# Altium PCB Shift_register_pcb.PcbDoc
Units mm, origin at the board's own origin, x right, y up, seen from the top; angles counter-clockwise.
Board outline 40.64 x 30.48 mm, 4 copper layers (Top Layer, Inner 1, Inner 2, Bottom Layer), stack 1.301 mm thick; 19 components, 42 nets, 108 pads, 45 vias.
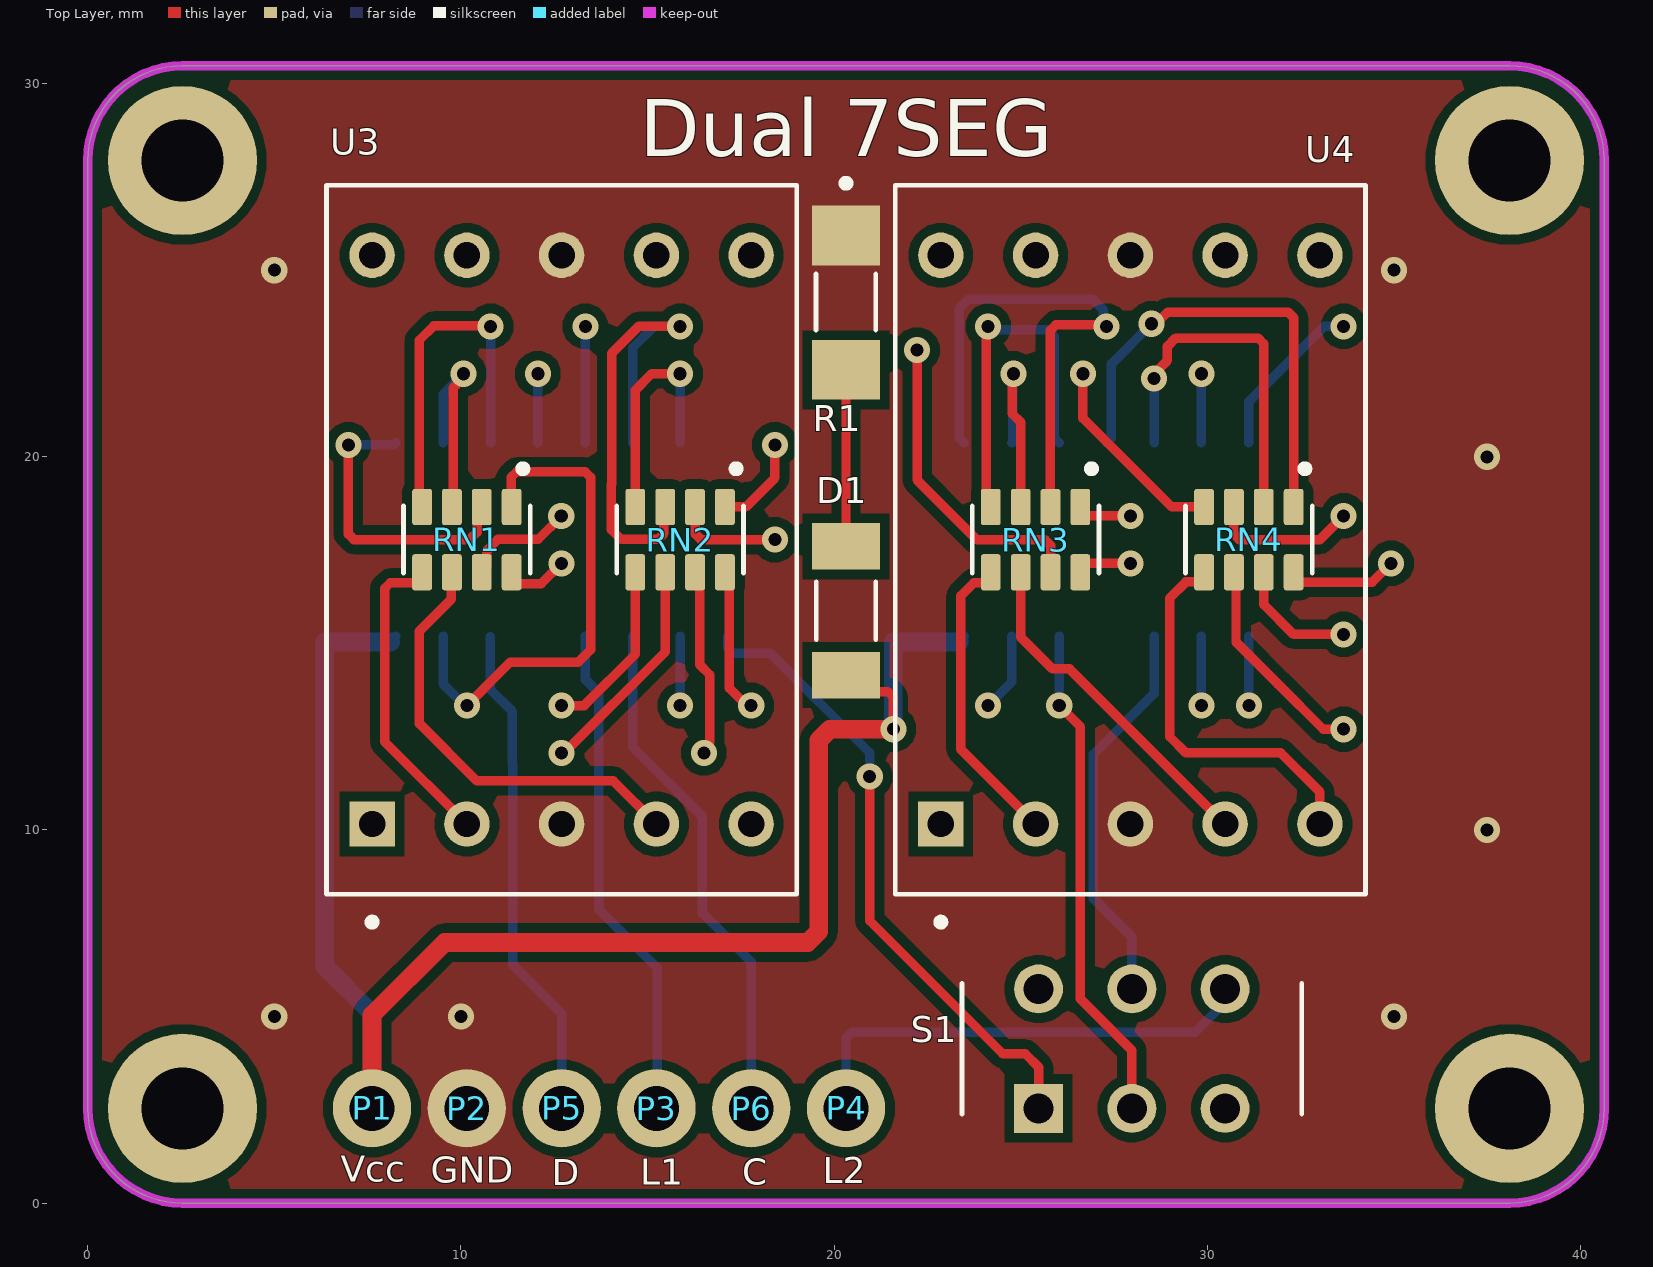
[diagram p0: Top Layer view]
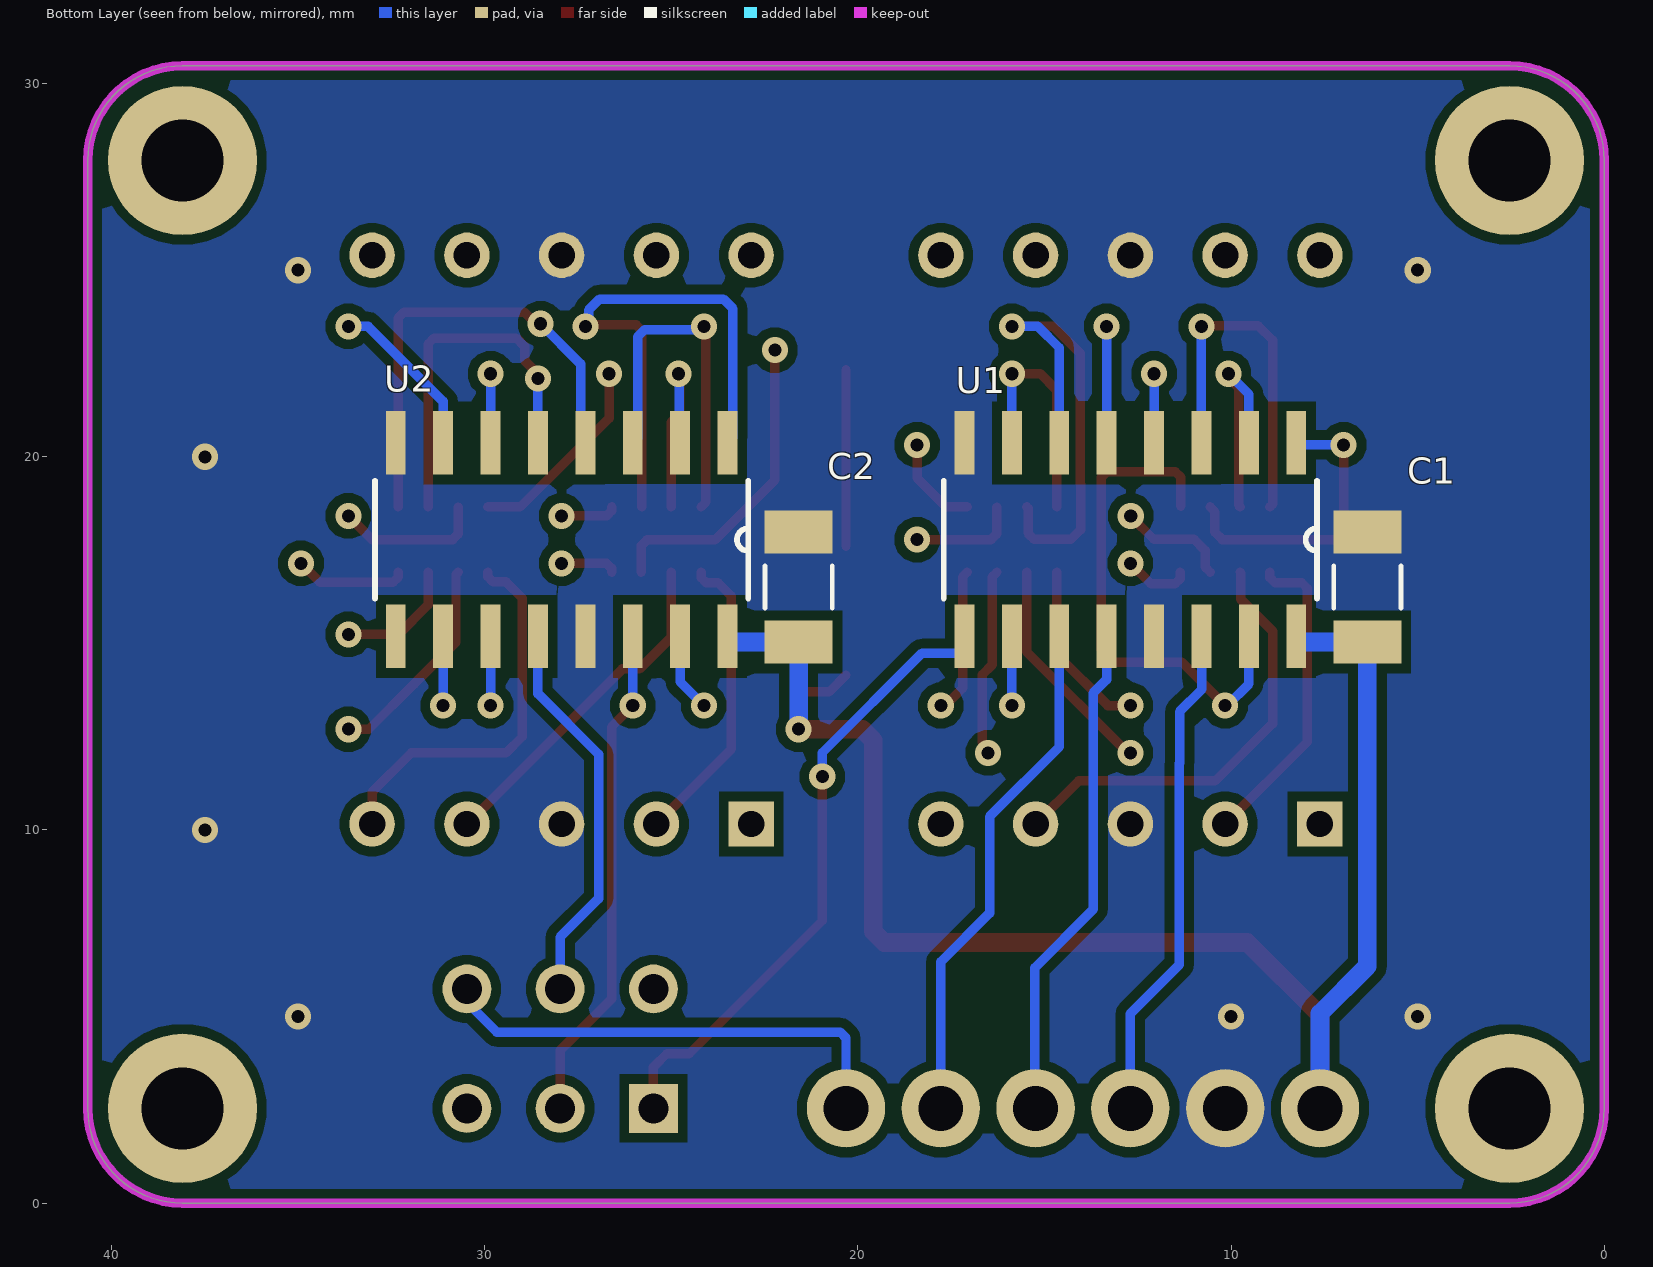
[diagram p1: Bottom Layer view, seen from below]
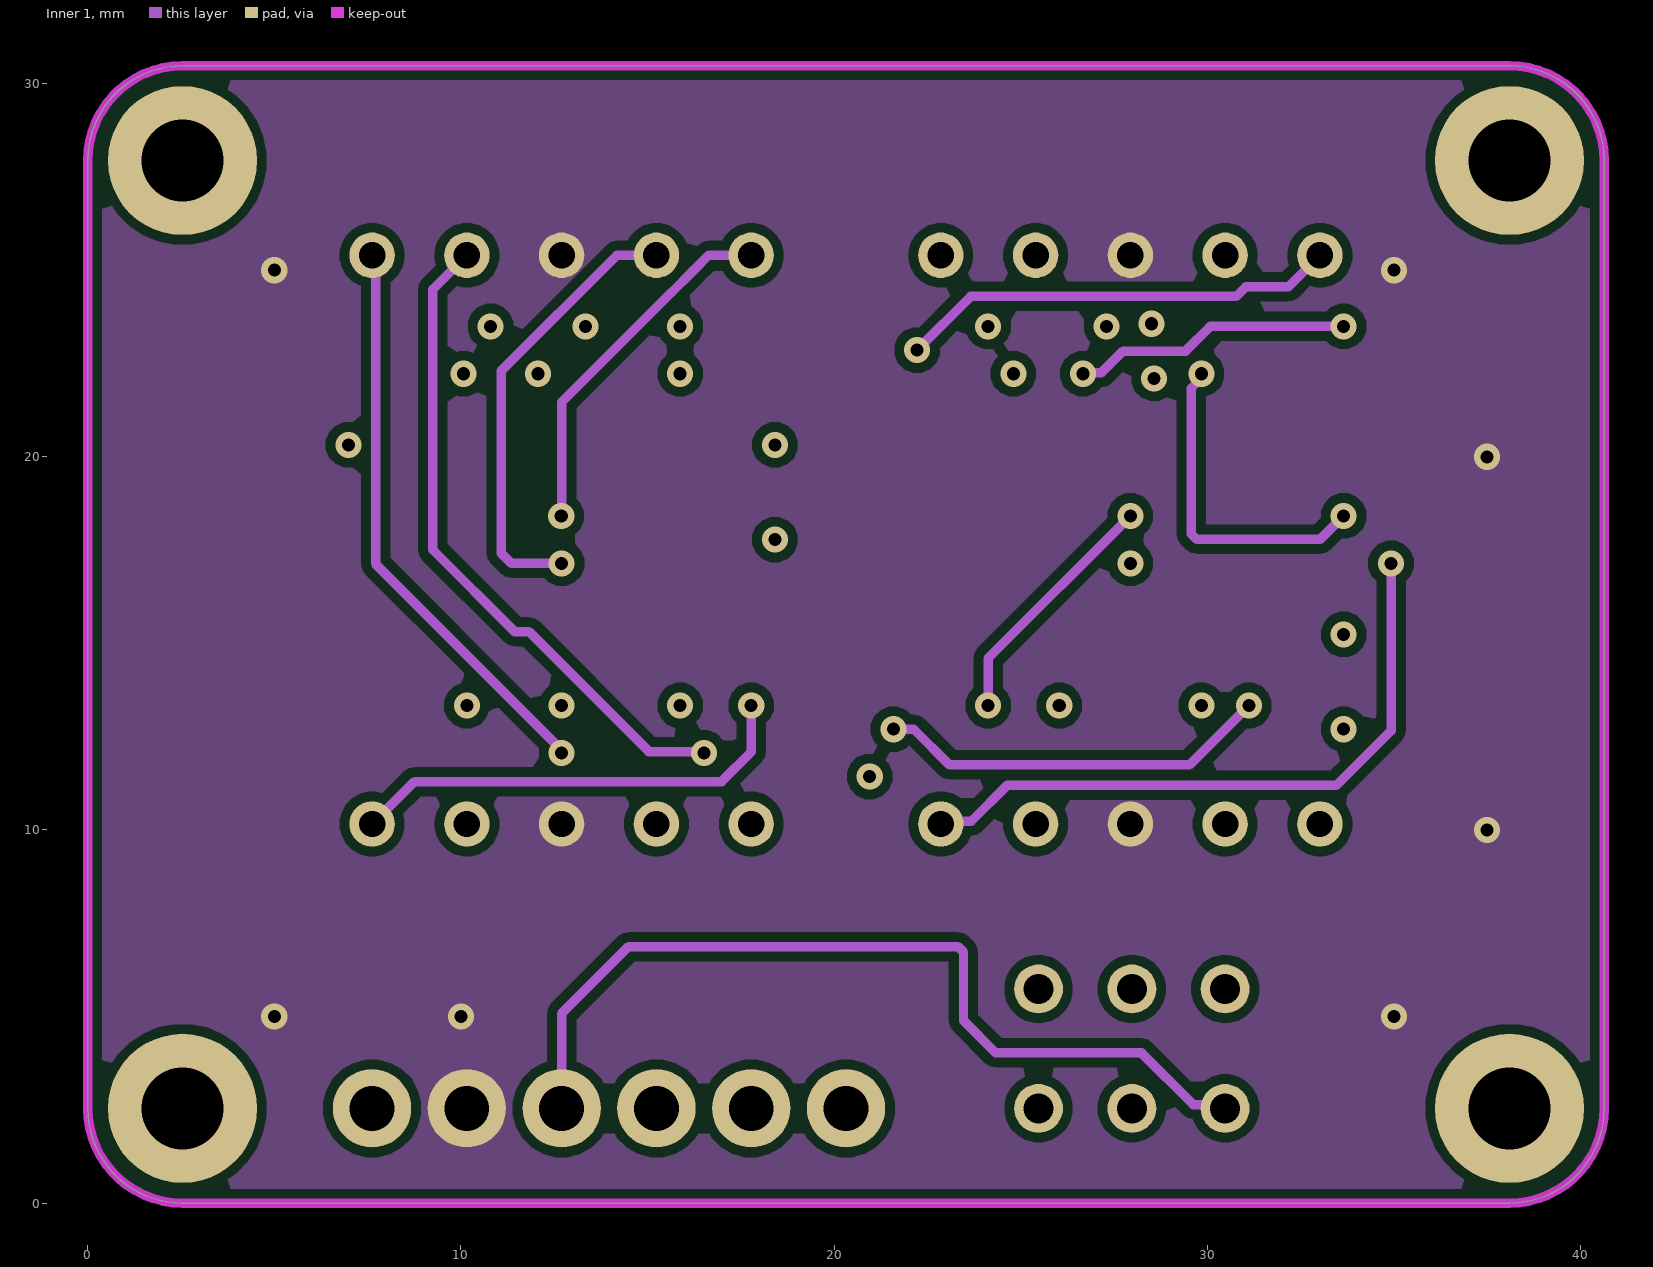
[diagram p2: Inner 1]
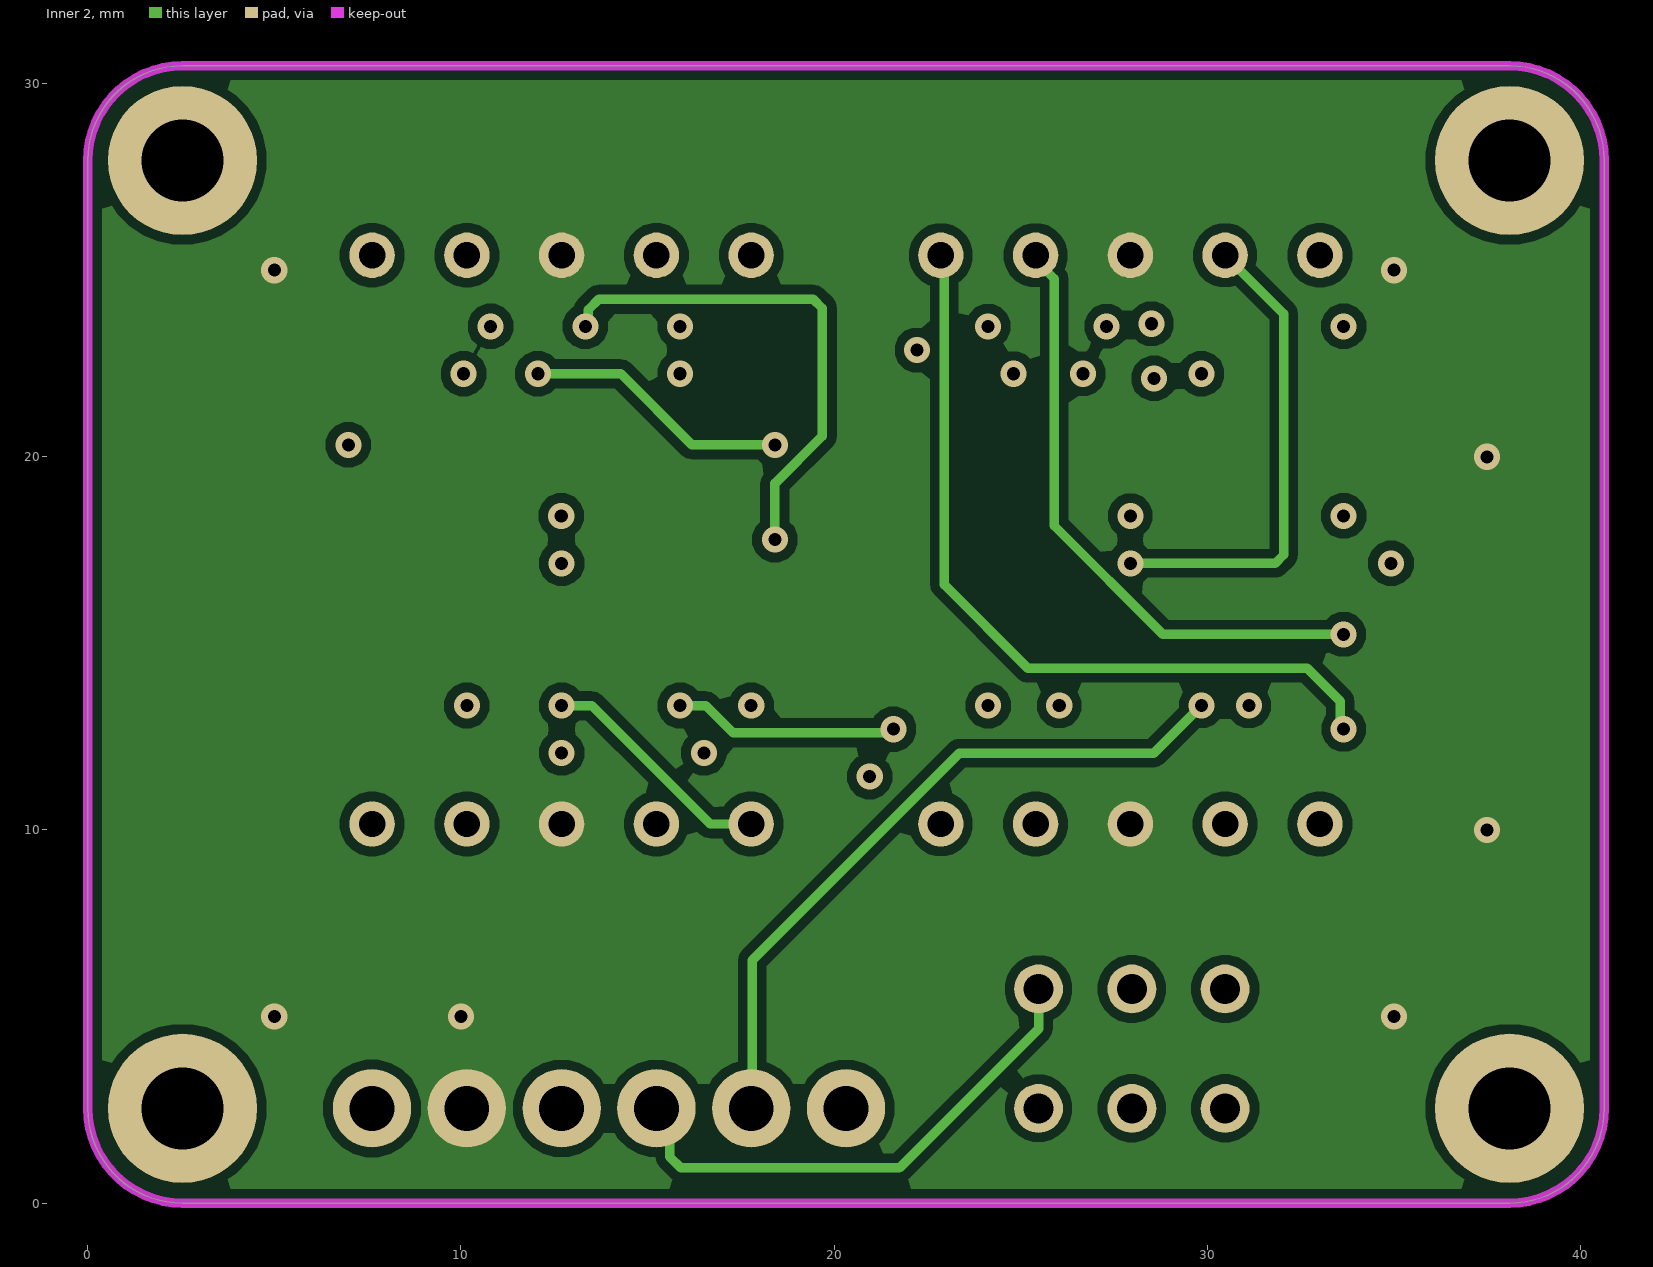
[diagram p3: Inner 2]
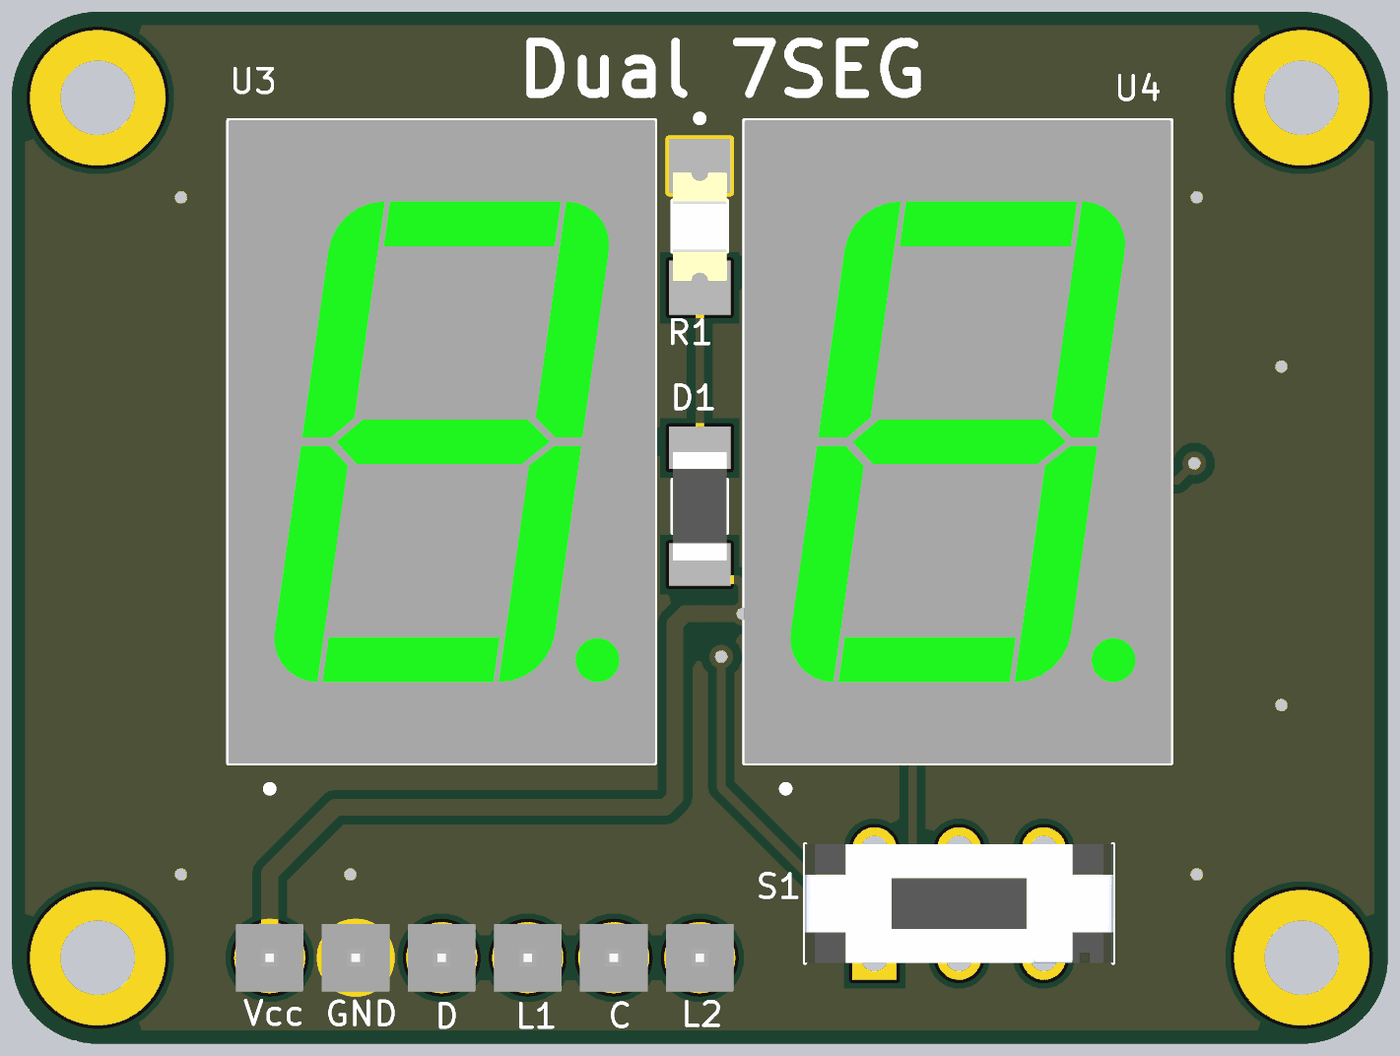
[diagram p4: 3D render of the assembled board from above, using the file's embedded part models]
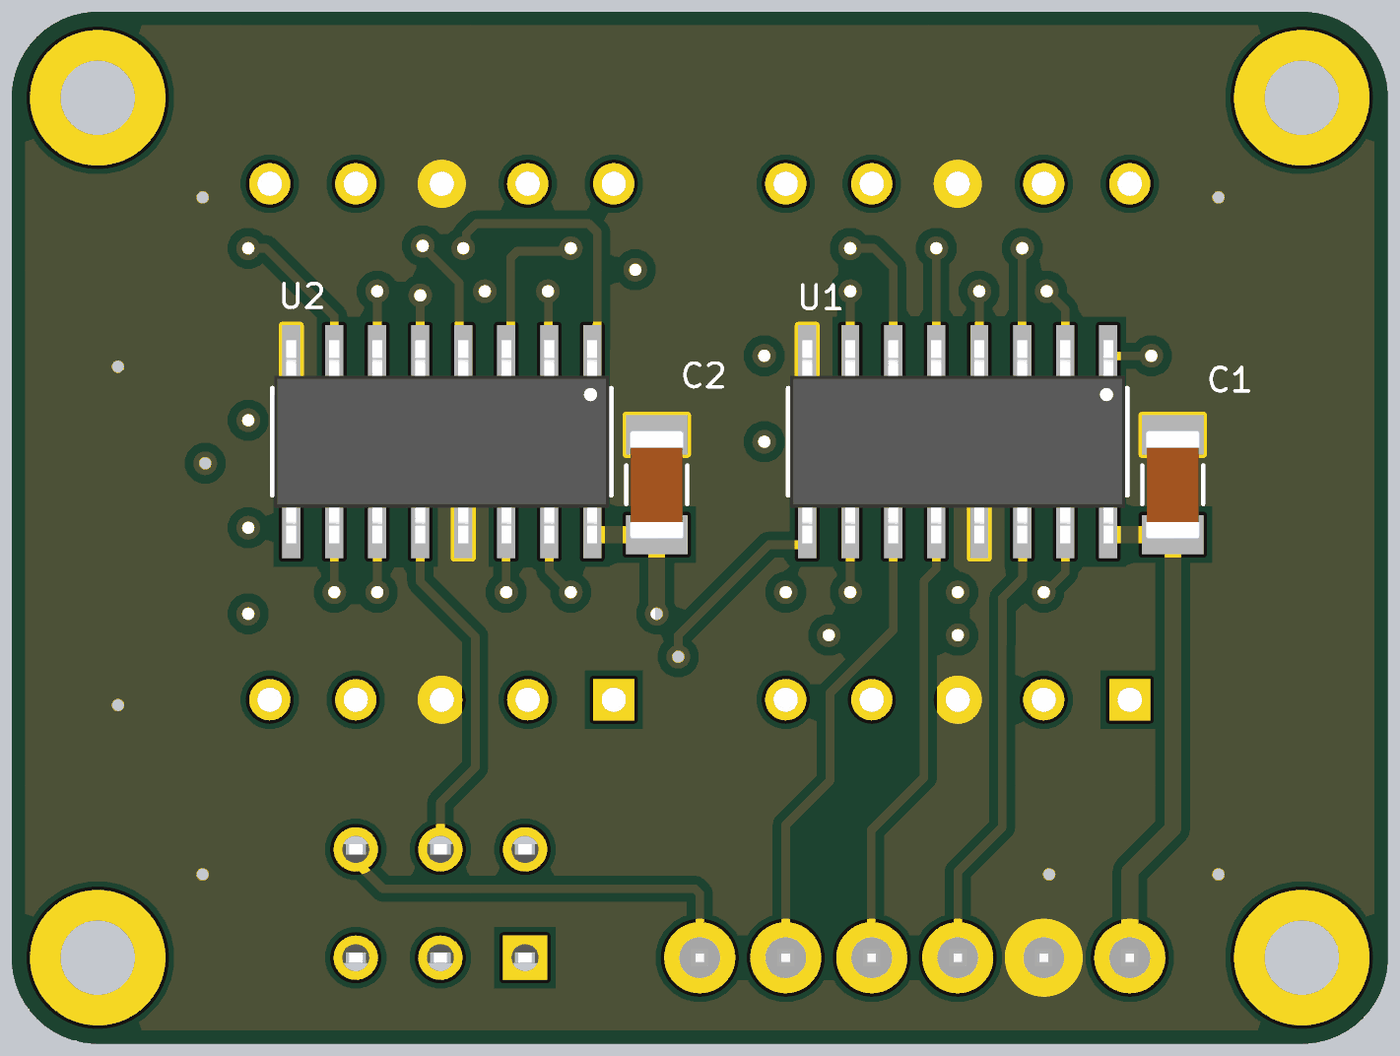
[diagram p5: 3D render of the assembled board from below, using the file's embedded part models]

## Layer stack, top to bottom
Top Solder: solder mask 0.0102, Solder Resist, Dk 3.5
Top Layer: signal copper 0.0356
Dielectric 2: prepreg 0.18, PP-006, Dk 4.1
Inner 1: signal copper 0.035
Dielectric 1: dielectric 0.8, FR-4, Dk 4.8
Inner 2: signal copper 0.035
Dielectric 3: prepreg 0.18, PP-006, Dk 4.1
Bottom Layer: signal copper 0.0356
Bottom Solder: solder mask 0.0102, Solder Resist, Dk 3.5

## Board outline
0,2.54 0,27.94 cw(c2.54,27.94) 2.54,30.48 38.1,30.48 cw(c38.1,27.94) 40.64,27.94 40.64,2.54 cw(c38.1,2.54) 38.1,0 2.54,0 cw(c2.54,2.54)

## Design rules (kind name [scope] priority, off if disabled: settings)
Clearance [All] p1: gap=0.254 ignorepadtopadclearanceinfootprint=FALSE
MinimumSolderMaskSliver [All] p1: minsoldermaskwidth=0.066
PolygonConnect [All] p1: connectstyle=Direct reliefconductorwidth=0.254 reliefentries=4 polygonreliefangle="90 Angle" airgapwidth=0.254
RoutingVias [All] p1: holewidth=0.711 width=1.27 viastyle="Through Hole" minholewidth=0.711 minwidth=1.27 maxholewidth=0.711 maxwidth=1.27
SilkToSolderMaskClearance [IsPad] p1: minsilkscreentomaskgap=0.165 clearancetoexposedcopper=TRUE
SolderMaskExpansion SolderMaskExpansion_1 [IsVia] p1: expansion=0.102 istentingtop=TRUE
SolderMaskExpansion [All] p2: expansion=0.102 istentingtop=FALSE
SupplyNets "Schematic Supply Nets_8" [InNet('Data_2')] p1: voltage=0.000
SupplyNets "Schematic Supply Nets_7" [InNet('Data_out')] p2: voltage=0.000
SupplyNets "Schematic Supply Nets_6" [InNet('Latch2_in')] p3: voltage=0.000
SupplyNets "Schematic Supply Nets_5" [InNet('Latch')] p4: voltage=0.000
SupplyNets "Schematic Supply Nets_4" [InNet('VCC')] p5: voltage=0.000
SupplyNets "Schematic Supply Nets_3" [InNet('Data')] p6: voltage=0.000
SupplyNets "Schematic Supply Nets_2" [InNet('Latch_2')] p7: voltage=0.000
SupplyNets "Schematic Supply Nets_1" [InNet('Clock')] p8: voltage=0.000
SupplyNets "Schematic Supply Nets" [InNet('GND')] p9: voltage=0.000
Width [All] p1: maxlimit=0.5 minlimit=0.254 preferedwidth=0.254 midlayer1_maxwidth=0.254 midlayer2_maxwidth=0.254 minimp=50.000000 maximp=50.000000 favimp=50.000000
28 further rules are at their usual default settings.

## Classes and differential pairs
component class Shift_register_schematic: C1 C2 D1 P1 P2 P3 P4 P5 P6 R1 RN1 RN2 RN3 RN4 S1 U2 U4

## Components (designator, comment, footprint, x,y, rotation, side; value= is the part's Value field where it differs from the comment)
C1 "100n" "Capacitor 1206" 6.35,16.51 r270 bottom
C2 "100n" "Capacitor 1206" 21.59,16.51 r270 bottom
D1 "Green" "LED 1206" 20.32,24.13 r270 top
P1 "Vcc" PCB_Pin_1 7.62,2.54 r0 top
P2 "GND" PCB_Pin_1 10.16,2.54 r0 top
P3 "Latch1_pin" PCB_Pin_1 15.24,2.54 r0 top
P4 "Latch2_pin" PCB_Pin_1 20.32,2.54 r0 top
P5 "Data_pin" PCB_Pin_1 12.7,2.54 r0 top
P6 "Clock_pin" PCB_Pin_1 17.78,2.54 r0 top
R1 "330" "Resistor 1206" 20.32,15.875 r90 top
RN1 "330" "Resistor array 1206" 10.16,17.78 r270 top
RN2 "330" "Resistor array 1206" 15.875,17.78 r270 top
RN3 "330" "Resistor array 1206" 25.4,17.78 r270 top
RN4 "330" "Resistor array 1206" 31.115,17.78 r270 top
S1 "Switch 6 pins" "Switch 6 pins" 27.98,4.14 r90 top
U1 "74HC595D 16-SO" "74HC595 SO-16" 12.7,17.78 r270 bottom
U2 "74HC595D 16-SO" "74HC595 SO-16" 27.94,17.78 r270 bottom
U3 "7-segments 0,56" "7-segments 0,56" 12.7,17.78 r90 top
U4 "7-segments 0,56" "7-segments 0,56" 27.94,17.78 r90 top

## Footprints (in the part's own frame and the unit in brackets; to place one, negate y for a bottom-side part, rotate by r counter-clockwise, add the part's x,y. Pads: shape width x height; smd on the part's side, far side on the other; paste and mask are expansions set on the pad)
"7-segments 0,56" [mm]
  rect 1.218x1.218 / inner round 1.218 / far side rect 1.218x1.218 hole 0.71: 1(-7.62,5.08)
  round 1.218 hole 0.71: 2(-7.62,2.54) 3(-7.62,0) 4(-7.62,-2.54) 5(-7.62,-5.08) 6(7.62,-5.08) 7(7.62,-2.54) 8(7.62,0) 9(7.62,2.54) 10(7.62,5.08)
  silkscreen extent -10.35,-6.3 9.5,6.3, body extent -9.5,-6.3 9.5,6.3, height 8
"74HC595 SO-16" [mil]
  rect 67x21 smd paste+0 mask+4.02: 1(-102,175) 2(-102,125) 3(-102,75) 4(-102,25) 5(-102,-25) 6(-102,-75) 7(-102,-125) 8(-102,-175) 9(102,-175) 10(102,-125) 11(102,-75) 12(102,-25) 13(102,25) 14(102,75) 15(102,125) 16(102,175)
  silkscreen extent -62,-197 62,197, body extent -118,-195 118,195, height 69
"Capacitor 1206" [mm]
  rect 1.16x1.82 smd: 1(-1.475,0) 2(1.475,0)
  silkscreen extent -0.57,-0.9 0.57,0.9, body extent -1.6,-0.8 1.6,0.8, height 1.78
"LED 1206" [mm]
  rect 1.6x1.82 smd: A(1.8,0) C(-1.8,0)
  silkscreen extent -3.3,-0.8 0.73,0.8, body extent -1.6,-0.8 1.6,0.8, height 1.12
PCB_Pin_1 [mm]
  round 2.1 hole 1.2: 0(0,0)
  body extent -1,-1 1,1, height 4.55
"Resistor 1206" [mm]
  rect 1.25x1.82 smd: 1(-1.725,0) 2(1.725,0)
  silkscreen extent -0.78,-0.8 0.78,0.8, body extent -1.6,-0.8 1.6,0.8, height 0.6
"Resistor array 1206" [mm]
  rrect25% 0.97x0.53 smd: 1(-0.875,1.2) 2(-0.875,0.4) 3(-0.875,-0.4) 4(-0.875,-1.2) 5(0.875,-1.2) 6(0.875,-0.4) 7(0.875,0.4) 8(0.875,1.2)
  silkscreen extent -2,-1.7 0.9,1.7, body extent -0.8,-1.6 0.8,1.6, height 0.6
"Switch 6 pins" [mm]
  rect 1.308x1.308 / inner round 1.308 / far side rect 1.308x1.308 hole 0.8: 1(-1.6,2.5)
  round 1.308 hole 0.8: 2(-1.6,0) 3(-1.6,-2.5) 4(1.6,2.5) 5(1.6,0) 6(1.6,-2.5)
  silkscreen extent -1.75,-4.55 1.75,4.55, body extent -1.75,-4.55 1.75,4.55, height 5.5

## Part data
C1 C2: library part "Capacitor 1206", Package="3216 AVX", Check_prices=https://www.snapeda.com/parts/12061C225K4T2A/AVX/view-part/?ref=eda, MF=AVX, MP=12061C225K4T2A, SnapEDA_Link=https://www.snapeda.com/parts/12061C225K4T2A/AVX/view-part/?ref=snap
D1: library part "LED 1206", Package="1206 Lite-On", Check_prices=https://www.snapeda.com/parts/LTST-C230KGKT/Lite-On/view-part/?ref=eda, MF="Lite-On Inc.", MP=LTST-C230KGKT, SnapEDA_Link=https://www.snapeda.com/parts/LTST-C230KGKT/Lite-On/view-part/?ref=snap
P1 P2 P3 P4 P5 P6: library part PIN_1
R1: library part "Resistor 1206", Package=None, Availability=Unavailable, MP=ERJU08F4703V, Price=None
RN1 RN2 RN3 RN4: library part "Resistor array 1206", "Resistor,Thick Film,Networks & Arrays,330 Ohm,5%,8 Pin", Package="NON STANDARD-8 Bourns", Check_prices=https://www.snapeda.com/parts/CAY16-331J4LF/Bourns/view-part/?ref=eda, MF=Bourns, MP=CAY16-331J4LF, SnapEDA_Link=https://www.snapeda.com/parts/CAY16-331J4LF/Bourns/view-part/?ref=snap
S1: "Switch MSK-22D18G2", Package=None, Check_prices=https://www.snapeda.com/parts/TL2201EEZA/E-Switch/view-part/?ref=eda, MF=E-Switch, MP=TL2201EEZA, SnapEDA_Link=https://www.snapeda.com/parts/TL2201EEZA/E-Switch/view-part/?ref=snap
U1 U2: "Shift Shift Register 1 Element 8 Bit 16-SO", Package="SOIC-16 ON Semiconductor", Check_prices=https://www.snapeda.com/parts/74HC595D/AUJ/NXP+Semiconductors/view-part/?ref=eda, MF="NXP USA", MP=74HC595D/AUJ, SnapEDA_Link=https://www.snapeda.com/parts/74HC595D/AUJ/NXP+Semiconductors/view-part/?ref=snap
U3 U4: ".56IN. 7 SEGMENT SINGLE DISPLAY, 565NM GREEN, GRAY FACE, WHITE SEGMENTS, COMMON", Package=None, Check_prices=https://www.snapeda.com/parts/LDS-C512RI/Lumex/view-part/?ref=eda, MF=Lumex, MP=LDS-C512RI, SnapEDA_Link=https://www.snapeda.com/parts/LDS-C512RI/Lumex/view-part/?ref=snap

## Free pads (board coordinates)
  round 4 hole 2.2 unplated: 1(2.54,27.94) 2(38.1,27.94) 3(2.54,2.54) 4(38.1,2.54)

## Via types
v1: diameter 0.7, hole 0.35, Top Layer to Bottom Layer, tented both sides, 45 vias

## Nets (pads, with @x,y where several pads share a name; then routed paths per layer and width w, separated by ;. In a path a pad name is that pad's centre, name@x,y a point inside that pad or via, vN(x,y) a via of type N, cw(c..) or ccw(c..) an arc to the next point about the centre after c; other vN are vias at no path point)
Clock: P6.0 U1.11 U2.11 | length 34.7
  Inner 2 w0.254: P6.0 17.811,2.571 17.811,6.511 23.36,12.06 28.57,12.06 v1(29.845,13.335)
  Bottom Layer w0.254: U1.11 14.605,12.227 16.473,10.36 16.473,7.771 17.78,6.464 P6.0 ; v1(29.845,13.335) U2.11
Data: P5.0 S1.3 U1.14 | length 37.4
  Inner 1 w0.254: P5.0 12.7,5.08 14.496,6.876 23.32,6.876 23.468,6.727 23.468,4.891 24.333,4.026 28.242,4.026 29.626,2.642 30.378,2.642 S1.3
  Bottom Layer w0.254: U1.14@10.785,15.179 10.785,13.768 11.381,13.172 11.381,11.792 11.386,11.786 11.386,6.394 12.7,5.08 P5.0
Data_2: S1.2 U2.14 | length 13.5
  Top Layer w0.254: v1(26.035,13.335) 26.603,12.767 26.603,5.472 27.98,4.095 S1.2
  Bottom Layer w0.254: v1(26.035,13.335) U2.14
Data_out: S1.1 U1.9 | length 17
  Top Layer w0.254: v1(20.955,11.43) 20.955,7.568 24.52,4.003 25.123,4.003 25.48,3.646 S1.1
  Bottom Layer w0.254: U1.9 17.145,14.881 17.285,14.741 18.282,14.741 20.955,12.068 v1(20.955,11.43)
GND: C1.1 C2.1 D1.C P2.0 U1.8 U1.13 U2.8 U2.13 U3.3 U3.8 U4.3 U4.8
  other v1: 5,5 10,5 35,5 37.5,10 37.5,20 5,25 35,25
Latch: P3.0 S1.4 U1.12 | length 27.5
  Inner 2 w0.254: P3.0 15.593,2.187 15.593,1.244 15.895,0.943 21.752,0.943 25.48,4.671 S1.4
  Bottom Layer w0.254: U1.12 13.335,14.031 13.697,13.669 13.697,7.871 15.258,6.31 15.258,2.558 P3.0
Latch2_in: P4.0 S1.6 | length 12.4
  Bottom Layer w0.254: P4.0 20.32,4.43 20.469,4.578 29.674,4.578 S1.6@30.48,5.385
Latch_2: S1.5 U2.12 | length 10.5
  Bottom Layer w0.254: S1.5 27.98,7.129 26.95,8.159 26.95,12.028 28.575,13.653 U2.12
NetD1_A: D1.A R1.2 | length 4.7
  Top Layer w0.254: R1.2 D1.A
NetRN1_1: RN1.1 U1.15 | length 13.7
  Top Layer w0.254: v1(10.16,13.335) 11.318,14.493 13.139,14.493 13.477,14.83 13.477,19.45 13.328,19.599 11.495,19.599 11.346,19.45 RN1.1@11.346,18.669
  Bottom Layer w0.254: U1.15 9.525,13.913 10.103,13.335 v1(10.16,13.335)
NetRN1_2: RN1.2 U1.1 | length 8
  Top Layer w0.254: v1(6.985,20.32) 6.985,17.929 7.134,17.78 10.235,17.78 10.438,17.983 10.438,18.533 RN1.2
  Bottom Layer w0.254: v1(6.985,20.32) 8.204,20.32 U1.1
NetRN1_3: RN1.3 U1.2 | length 5.8
  Top Layer w0.254: RN1.3 9.8,18.695 9.8,21.853 10.072,22.125 v1(10.072,22.225)
  Bottom Layer w0.254: U1.2 9.525,21.678 v1(10.072,22.225)
NetRN1_4: RN1.4 U1.3 | length 9.7
  Top Layer w0.254: RN1.4 8.886,18.729 8.886,23.124 9.271,23.509 10.781,23.509 v1(10.795,23.495)
  Bottom Layer w0.254: v1(10.795,23.495) 10.803,23.487 U1.3@10.803,20.379
NetRN1_5: RN1.5 U3.2 | length 8.5
  Top Layer w0.254: RN1.5 8.96,16.762 8.822,16.624 8.108,16.624 7.959,16.475 7.959,12.361 U3.2
NetRN1_6: RN1.6 U3.4 | length 11.9
  Top Layer w0.254: RN1.6 9.747,16.892 9.747,16.188 8.89,15.331 8.89,12.849 10.419,11.32 14.08,11.32 U3.4
NetRN1_7: RN1.7 U3.6 | length 12.8
  Top Layer w0.254: RN1.7 10.698,17.043 10.698,17.493 10.994,17.789 12.074,17.789 12.689,18.404 v1(12.689,18.415)
  Inner 1 w0.254: v1(12.689,18.415) 12.7,18.426 12.7,21.463 15.647,24.41 15.65,24.41 16.23,24.99 16.23,24.993 16.637,25.4 U3.6
NetRN1_8: RN1.8 U3.7 | length 13.8
  Top Layer w0.254: RN1.8 11.36,16.738 11.498,16.6 12.155,16.6 v1(12.7,17.145)
  Inner 1 w0.254: v1(12.7,17.145) 11.355,17.145 11.08,17.421 11.08,22.3 14.179,25.4 U3.7
NetRN2_1: RN2.1 U1.4 | length 11.5
  Top Layer w0.254: RN2.1 17.637,18.655 18.415,19.433 v1(18.415,20.32)
  Inner 2 w0.254: v1(12.065,22.225) 14.288,22.225 16.193,20.32 v1(18.415,20.32)
  Bottom Layer w0.254: U1.4 v1(12.065,22.225)
NetRN2_2: RN2.2 U1.5 | length 19.7
  Top Layer w0.254: RN2.2@16.283,18.647 16.283,17.929 16.432,17.78 v1(18.415,17.78)
  Inner 2 w0.254: v1(13.335,23.495) 13.414,23.574 13.414,23.942 13.698,24.226 19.44,24.226 19.685,23.981 19.685,20.556 18.415,19.286 v1(18.415,17.78)
  Bottom Layer w0.254: U1.5 v1(13.335,23.495)
NetRN2_3: RN2.3 U1.6 | length 13.2
  Top Layer w0.254: RN2.3 15.441,18.621 15.441,17.947 15.284,17.789 14.291,17.789 14.029,18.051 14.029,19.259 14.037,19.267 14.037,22.769 14.763,23.495 v1(15.875,23.495)
  Bottom Layer w0.254: U1.6 14.605,22.924 15.176,23.495 v1(15.875,23.495)
NetRN2_4: RN2.4 U1.7 | length 6.4
  Top Layer w0.254: RN2.4 14.675,21.789 15.111,22.225 v1(15.875,22.225)
  Bottom Layer w0.254: U1.7 v1(15.875,22.225)
NetRN2_5: RN2.5 U3.5 | length 11.1
  Top Layer w0.254: v1(12.7,13.335) 13.302,13.335 14.675,14.708 RN2.5
  Inner 2 w0.254: v1(12.7,13.335) 13.505,13.335 16.68,10.16 U3.5
NetRN2_6: RN2.6 U3.10 | length 21.5
  Top Layer w0.254: v1(12.7,12.065) 12.768,12.065 15.475,14.772 RN2.6
  Inner 1 w0.254: U3.10 7.716,25.304 7.716,17.129 12.7,12.145 v1(12.7,12.065)
NetRN2_7: RN2.7 U3.9 | length 22.9
  Top Layer w0.254: RN2.7 16.404,16.776 16.404,14.424 16.669,14.158 16.669,12.345 16.51,12.186 v1(16.51,12.065)
  Inner 1 w0.254: U3.9 9.246,24.486 9.246,17.507 11.438,15.315 11.821,15.315 15.037,12.1 16.475,12.1 v1(16.51,12.065)
NetRN2_8: RN2.8 U3.1 | length 16.1
  Top Layer w0.254: RN2.8 17.192,16.788 17.192,13.803 17.659,13.335 v1(17.78,13.335)
  Inner 1 w0.254: U3.1 8.758,11.298 16.986,11.298 17.78,12.092 v1(17.78,13.335)
NetRN3_1: RN3.1 U2.15 | length 10.3
  Top Layer w0.254: RN3.1 26.6,18.553 26.738,18.415 v1(27.94,18.415)
  Inner 1 w0.254: v1(24.13,13.335) 24.13,14.605 v1(27.94,18.415)
  Bottom Layer w0.254: v1(24.13,13.335) 24.765,13.97 U2.15
NetRN3_2: RN3.2 U2.1 | length 14.5
  Top Layer w0.254: RN3.2@25.797,18.658 25.797,23.388 25.946,23.536 27.264,23.536 v1(27.305,23.495)
  Bottom Layer w0.254: U2.1 23.355,20.511 23.355,21.237 23.349,21.243 23.349,23.97 23.605,24.226 26.925,24.226 27.22,23.931 27.22,23.58 v1(27.305,23.495)
NetRN3_3: RN3.3 U2.2 | length 5.5
  Top Layer w0.254: v1(24.804,22.225) 24.774,22.195 24.774,21.154 25,20.928 RN3.3
  Bottom Layer w0.254: U2.2 24.785,20.39 24.785,22.205 v1(24.804,22.225)
NetRN3_4: RN3.4 U2.3 | length 9.7
  Top Layer w0.254: v1(24.13,23.495) 24.073,23.438 24.073,18.782 RN3.4
  Bottom Layer w0.254: v1(24.13,23.495) 24.215,23.41 25.712,23.41 25.905,23.217 25.905,20.501 U2.3
NetRN3_5: RN3.5 U4.2 | length 8.1
  Top Layer w0.254: RN3.5 24.2,16.759 24.062,16.621 23.742,16.621 23.399,16.278 23.399,12.161 U4.2
NetRN3_6: RN3.6 U4.4 | length 9.3
  Top Layer w0.254: RN3.6 25,15.171 25.856,14.315 26.311,14.315 U4.4@30.466,10.16
NetRN3_7: RN3.7 U4.6 | length 20.3
  Top Layer w0.254: v1(22.225,22.86) 22.225,19.38 23.833,17.772 25.653,17.772 25.802,17.623 RN3.7@25.802,16.907
  Inner 1 w0.254: v1(22.225,22.86) 23.661,24.296 30.776,24.296 31.036,24.556 32.176,24.556 U4.6
NetRN3_8: RN3.8 U4.7 | length 14.4
  Top Layer w0.254: RN3.8 26.6,17.007 26.738,17.145 v1(27.94,17.145)
  Inner 2 w0.254: v1(27.94,17.145) 31.821,17.145 32.051,17.375 32.051,23.829 U4.7
NetRN4_1: RN4.1 U2.4 | length 12.8
  Top Layer w0.254: v1(28.505,23.565) 28.626,23.565 28.94,23.879 32.164,23.879 32.313,23.731 RN4.1@32.313,18.657
  Bottom Layer w0.254: U2.4 27.43,20.496 27.43,22.49 v1(28.505,23.565)
NetRN4_2: RN4.2 U2.5 | length 9.8
  Top Layer w0.254: v1(28.575,22.103) 28.575,22.224 28.933,22.581 28.933,22.959 29.153,23.18 31.366,23.18 31.515,23.031 RN4.2
  Bottom Layer w0.254: U2.5 v1(28.575,22.103)
NetRN4_3: RN4.3 U2.6 | length 14.7
  Top Layer w0.254: RN4.3 30.715,17.929 30.864,17.78 33.02,17.78 v1(33.655,18.415)
  Inner 1 w0.254: v1(29.845,22.225) 29.845,22.113 29.57,21.838 29.57,17.935 29.719,17.786 33.026,17.786 v1(33.655,18.415)
  Bottom Layer w0.254: U2.6 v1(29.845,22.225)
NetRN4_4: RN4.4 U2.7 | length 17.4
  Top Layer w0.254: v1(26.67,22.225) 26.67,21.034 29.049,18.655 RN4.4
  Inner 1 w0.254: v1(26.67,22.225) 26.7,22.255 27.166,22.255 27.744,22.834 29.42,22.834 30.081,23.495 v1(33.655,23.495)
  Bottom Layer w0.254: U2.7 31.115,21.483 33.127,23.495 v1(33.655,23.495)
NetRN4_5: RN4.5 U4.5 | length 10.5
  Top Layer w0.254: RN4.5 29.915,16.787 29.777,16.649 29.429,16.649 28.994,16.215 28.994,12.5 29.429,12.065 31.969,12.065 33.02,11.014 U4.5
NetRN4_6: RN4.6 U4.10 | length 27.3
  Top Layer w0.254: RN4.6 30.771,16.849 30.771,15.034 31.895,13.909 31.898,13.909 33.108,12.7 v1(33.655,12.7)
  Inner 2 w0.254: U4.10 22.956,25.304 22.956,16.572 25.197,14.331 32.686,14.331 33.57,13.447 33.57,12.785 v1(33.655,12.7)
NetRN4_7: RN4.7 U4.9 | length 19.8
  Top Layer w0.254: RN4.7 31.515,16.039 32.314,15.24 v1(33.655,15.24)
  Inner 2 w0.254: U4.9 25.4,25.269 25.9,24.769 25.9,18.151 28.811,15.24 v1(33.655,15.24)
NetRN4_8: RN4.8 U4.1 | length 20.6
  Top Layer w0.254: RN4.8 32.315,16.774 32.453,16.636 34.416,16.636 v1(34.925,17.145)
  Inner 1 w0.254: U4.1 22.934,10.234 23.678,10.234 24.636,11.192 33.459,11.192 34.925,12.658 v1(34.925,17.145)
VCC: C1.2 C2.2 P1.0 R1.1 U1.10 U1.16 U2.10 U2.16 | length 64.7
  Top Layer w0.254: R1.1 20.765,13.705 21.441,13.705 21.59,13.557 v1(21.59,12.7)
  Top Layer w0.5: P1.0 7.619,5.041 9.564,6.985 19.296,6.985 19.589,7.278 19.589,12.407 19.882,12.7 v1(21.59,12.7)
  Inner 1 w0.254: v1(21.59,12.7) 22.136,12.7 23.094,11.742 29.522,11.742 v1(31.115,13.335)
  Inner 2 w0.254: v1(15.875,13.335) 16.562,13.335 17.293,12.604 21.373,12.604 21.469,12.7 v1(21.59,12.7)
  Bottom Layer w0.254: U1.16@8.115,15.035 8.255,15.175 U1.16 ; v1(15.875,13.335) U1.10 ; U2.16@23.355,15.035 23.495,15.175 U2.16 ; v1(31.115,13.335) U2.10
  Bottom Layer w0.5: P1.0 7.62,5.08 6.35,6.35 C1.2 U1.16@8.115,15.035 ; v1(21.59,12.7) C2.2 U2.16@23.355,15.035
pads on no net: U2.9

## Polygon pours and split planes (outlines as drawn)
GND on Inner 1 "NONET_L-01_P-001" (solid, remove dead copper, pour order 3): 0,0 0,30.48 40.64,30.48 40.64,0
GND on Inner 2 "NONET_L-01_P-001" (solid, remove dead copper, pour order 6): 0,0 0,30.48 40.64,30.48 40.64,0
GND on Top Layer "NONET_L-01_P-001" (solid, remove dead copper, pour order 7): 0,0 0,30.48 40.64,30.48 40.64,0
GND on Bottom Layer "NONET_L-01_P-001" (solid, remove dead copper, pour order 2): 0,0 0,30.48 40.64,30.48 40.64,0

## Keep-outs
Keep-Out Layer:
  the board outline again, w0.254

## Silkscreen, mask and mechanical layers (free items; w line width, h text height)
Top Overlay:
  text "Dual 7SEG" at 14.798,28.051 h1.52
  text "Vcc" at 6.776,0.57 h0.7
  text "GND" at 9.198,0.553 h0.7
  text "L2" at 19.703,0.536 h0.7
  text "C" at 17.545,0.498 h0.7
  text "D" at 12.433,0.484 h0.7
  text "L1" at 14.805,0.487 h0.7
Mechanical 1:
  the board outline again, w0.254